# Altium PCB adapter_pcb_bioGAPv2.PcbDoc
Units mm, origin at the board's own origin, x right, y up, seen from the top; angles counter-clockwise.
Board outline 25.25 x 32.12 mm, 2 copper layers (Top Layer, Bottom Layer), stack 0.303 mm thick; 16 components, 17 nets, 94 pads, 102 vias.
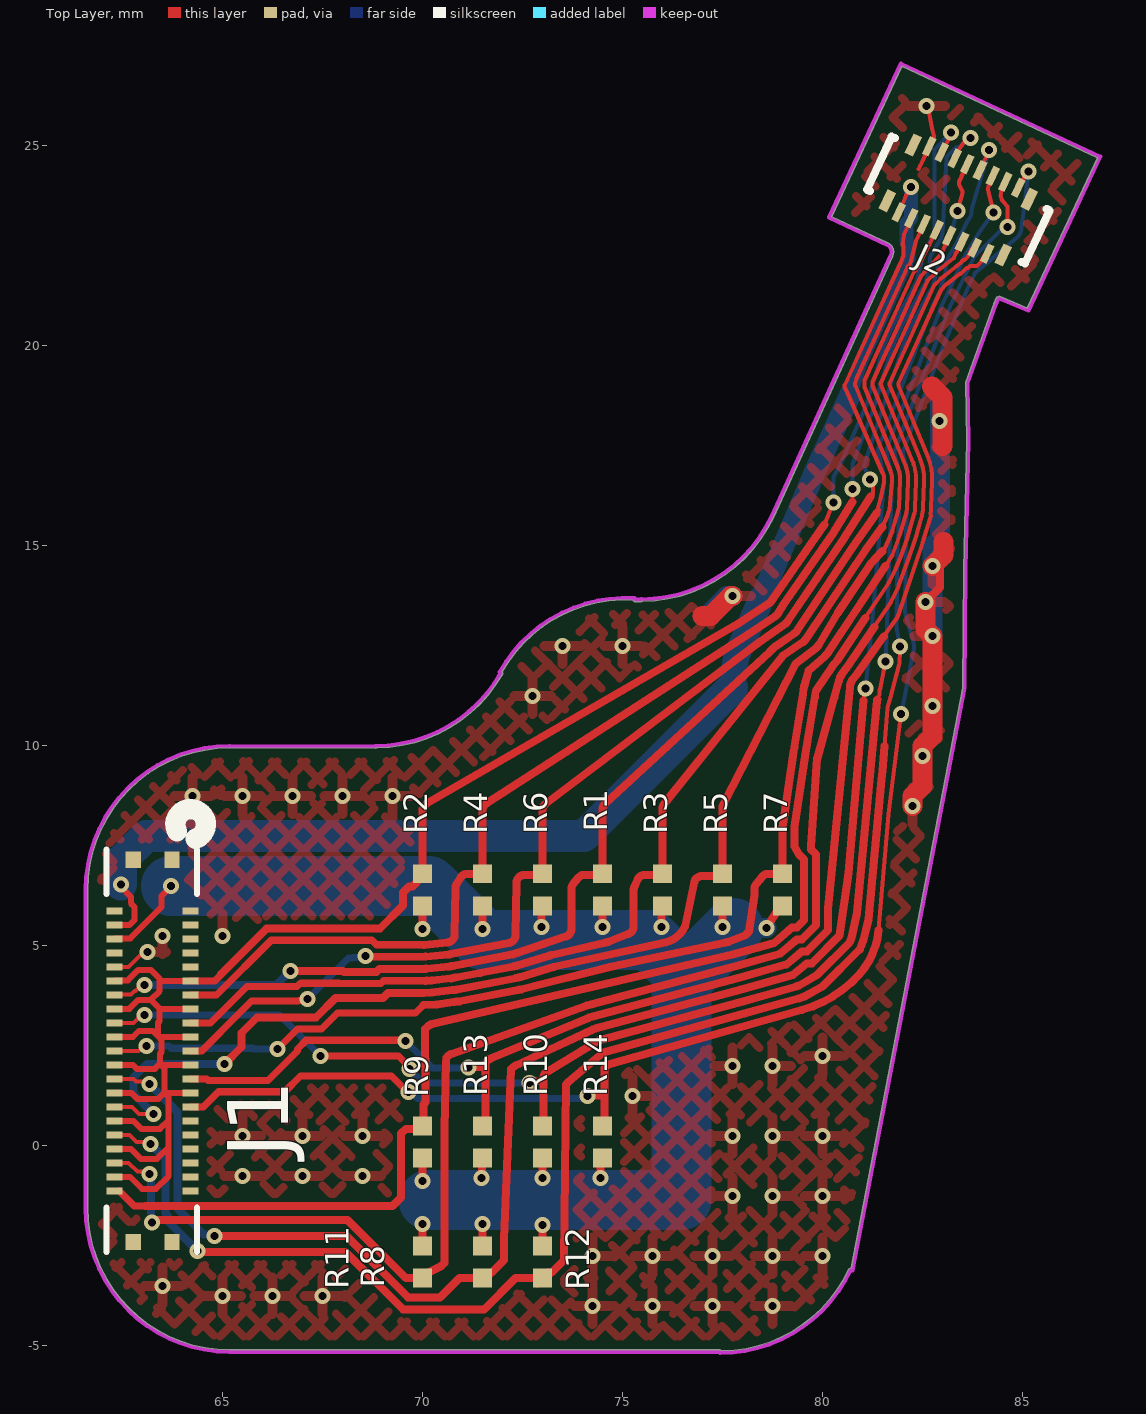
[diagram p0: Top Layer view]
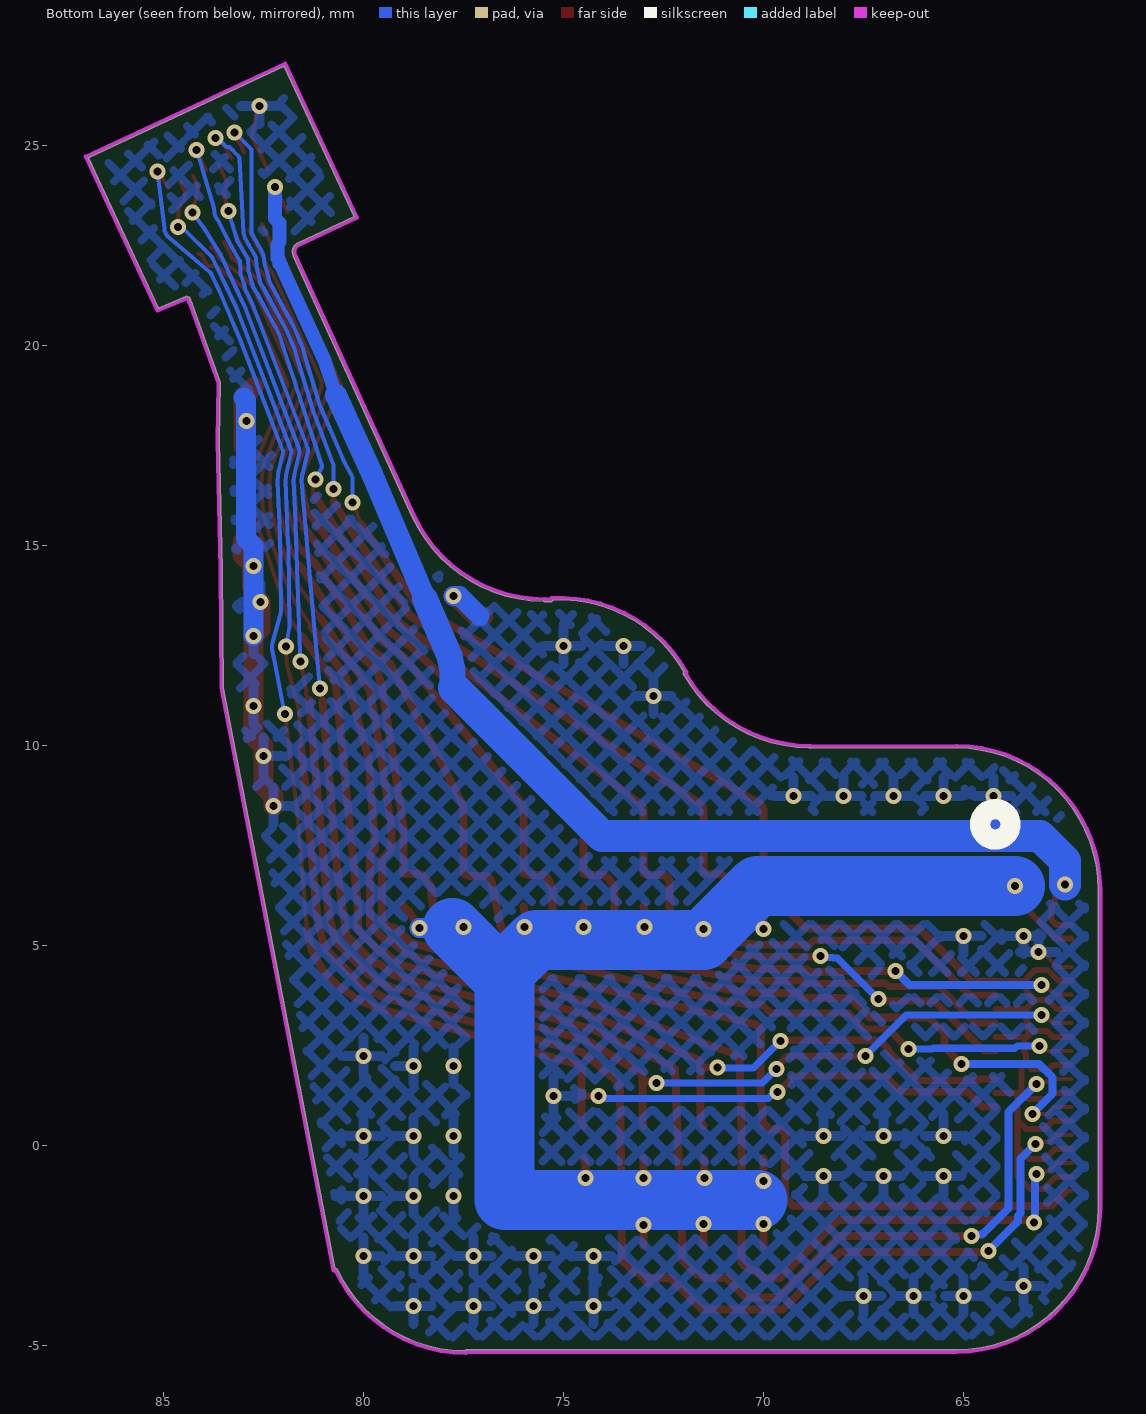
[diagram p1: Bottom Layer view, seen from below]
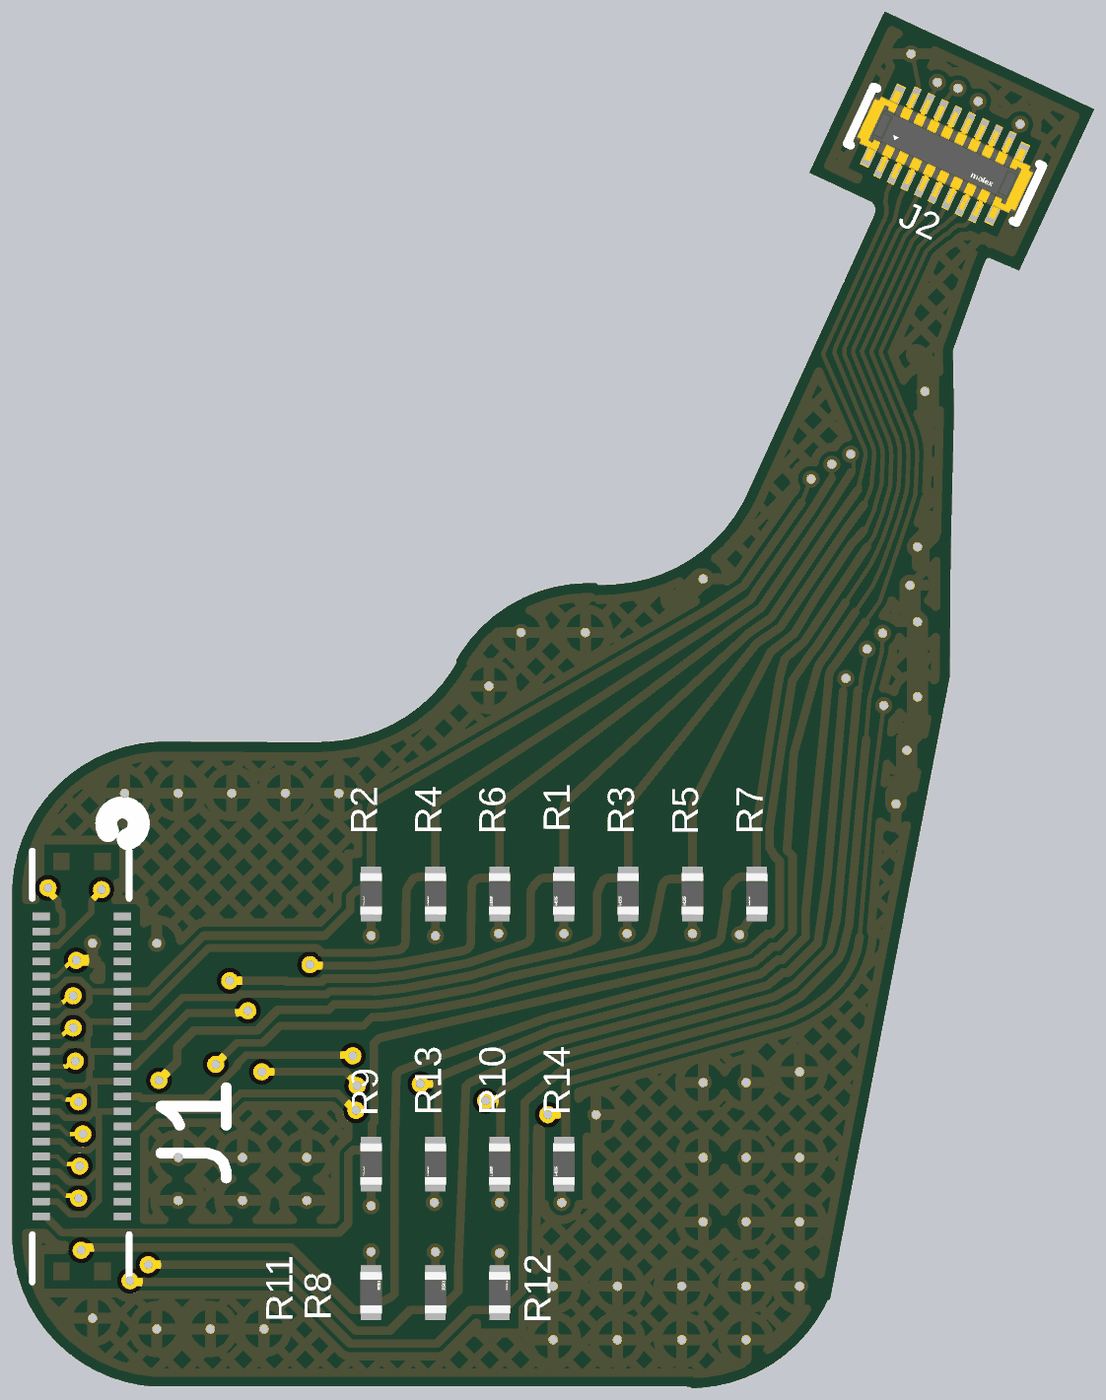
[diagram p2: 3D render of the assembled board from above, using the file's embedded part models]

## Layer stack, top to bottom
Top Coverlay: solder mask 0.0125, FC-001, Dk 4
Adhesive 1: prepreg 0.015, PP-006, Dk 4.1
Top Layer: signal copper 0.018
Adhesive 2: prepreg 0.013, PP-006, Dk 4.1
Dielectric 1: core 0.0125, PI, Dk 4.2
Adhesive 3: prepreg 0.013, PP-006, Dk 4.1
Bottom Layer: signal copper 0.018
Adhesive 4: prepreg 0.015, PP-006, Dk 4.1
Bottom Coverlay: solder mask 0.0125, FC-001, Dk 4
Stiffener 1: core 0.198, Core-009, Dk 4.5

## Board outline
61.627,-1.551 ccw(c65.175,-1.551) 65.175,-5.1 77.438,-5.1 77.483,-5.127 ccw(c77.438,-1.579) 80.654,-3.079 80.711,-3.051 83.5,11.455 83.525,14.4 83.525,14.401 83.6,17.625 83.575,19.074 83.578,19.092 84.278,21.042 84.279,21.045 84.354,21.22 84.42,21.246 85.121,20.946 86.875,24.708 81.982,26.989 80.228,23.229 81.624,22.575 81.65,22.569 cw(c81.525,22.352) 81.775,22.352 81.749,22.242 78.775,15.724 78.775,15.723 cw(c75.468,17.265) 75.5,13.616 75.467,13.604 75.299,13.605 75.25,13.646 ccw(c75.075,10.102) 71.993,11.859 72,11.8 cw(c68.825,13.598) 68.857,9.95 68.825,9.938 65.175,9.95 ccw(c65.175,6.402) 61.627,6.402

## Design rules (kind name [scope] priority, off if disabled: settings)
BoardOutlineClearance [All] p1: gap=0.2 ignorepadtopadclearanceinfootprint=FALSE except(-0.1: Track-SplitContinuation Poly-SplitContinuation; 0.1: Arc-SplitContinuation)
Clearance [All] p1: gap=0.1 ignorepadtopadclearanceinfootprint=FALSE except(0.15: Arc-SMDPad Track-SMDPad; 0.2: Arc-THPad Track-THPad SMDPad-THPad SMDPad-Via SMDPad-Fill SMDPad-Poly SMDPad-Region THPad-Fill THPad-Poly THPad-Region)
ComponentClearance [All] p1: gap=0.1 collisioncheckmode=3 verticalgap=0.254 showdistances=FALSE
DiffPairsRouting [All] p1: maxlimit=0.254 minlimit=0.254 mostfreqgap=0.254 substack1={F7067100-941A-459A-A07F-13557509BD1E} toplayer_{f7067100-941a-459a-a07f-13557509bd1e}_minwidth=0.381 toplayer_{f7067100-941a-459a-a07f-13557509bd1e}_maxwidth=0.381 toplayer_{f7067100-941a-459a-a07f-13557509bd1e}_prefwidth=0.381 bottomlayer_{f7067100-941a-459a-a07f-13557509bd1e}_minwidth=0.381 bottomlayer_{f7067100-941a-459a-a07f-13557509bd1e}_maxwidth=0.381 bottomlayer_{f7067100-941a-459a-a07f-13557509bd1e}_prefwidth=0.381 toplayer_minwidth=0.381 toplayer_maxwidth=0.381 toplayer_prefwidth=0.381 bottomlayer_minwidth=0.381 bottomlayer_maxwidth=0.381 bottomlayer_prefwidth=0.381 substack2={26E46543-D494-4314-9E09-E542AD71FD94} toplayer_{26e46543-d494-4314-9e09-e542ad71fd94}_minwidth=0.381 toplayer_{26e46543-d494-4314-9e09-e542ad71fd94}_maxwidth=0.381 toplayer_{26e46543-d494-4314-9e09-e542ad71fd94}_prefwidth=0.381 bottomlayer_{26e46543-d494-4314-9e09-e542ad71fd94}_minwidth=0.381 bottomlayer_{26e46543-d494-4314-9e09-e542ad71fd94}_maxwidth=0.381 bottomlayer_{26e46543-d494-4314-9e09-e542ad71fd94}_prefwidth=0.381 maxuncoupledlength=12.7
HoleSize [All] p1: absolutevalues=TRUE maxlimit=2.54 minlimit=0.2 maxpercent=80.000 minpercent=20.000
MinimumSolderMaskSliver [All] p1: minsoldermaskwidth=0.1
PolygonConnect [All] p1: connectstyle=Relief reliefconductorwidth=0.254 reliefentries=4 polygonreliefangle="90 Angle" airgapwidth=0.254
RoutingVias [All] p1: holewidth=0.2 width=0.4 viastyle="Through Hole" minholewidth=0.2 minwidth=0.4 maxholewidth=0.2 maxwidth=0.4
SilkToSilkClearance [All] p1: silktosilkclearance=0.1
SilkToSolderMaskClearance [IsPad] p1: minsilkscreentomaskgap=0.1 clearancetoexposedcopper=TRUE
SolderMaskExpansion [All] p1: expansion=0.102 istentingtop=FALSE
Width [All] p1: maxlimit=25 minlimit=0.1 preferedwidth=0.1 substack1={F7067100-941A-459A-A07F-13557509BD1E} substack2={26E46543-D494-4314-9E09-E542AD71FD94}
24 further rules are at their usual default settings.

## Components (designator, comment, footprint, x,y, rotation, side; value= is the part's Value field where it differs from the comment)
J1 "5050664222" CONN_5050664222_MOL 63.225,2.375 r270 top
J2 "505070-1622" FP-505070-1622-MFG 83.393,23.648 r335 top
R1 "RR0510P-472-D" FP-RR0510-IPC_C 74.5,6.402 r270 top
R2 "RR0510P-472-D" FP-RR0510-IPC_C 70,6.402 r270 top
R3 "RR0510P-472-D" FP-RR0510-IPC_C 76,6.402 r270 top
R4 "RR0510P-472-D" FP-RR0510-IPC_C 71.5,6.402 r270 top
R5 "RR0510P-472-D" FP-RR0510-IPC_C 77.5,6.402 r270 top
R6 "RR0510P-472-D" FP-RR0510-IPC_C 73,6.402 r270 top
R7 "RR0510P-472-D" FP-RR0510-IPC_C 79,6.402 r270 top
R8 "RR0510P-472-D" FP-RR0510-IPC_C 71.5,-2.902 r90 top
R9 "RR0510P-472-D" FP-RR0510-IPC_C 70,0.098 r270 top
R10 "RR0510P-472-D" FP-RR0510-IPC_C 73,0.098 r270 top
R11 "RR0510P-472-D" FP-RR0510-IPC_C 70,-2.902 r90 top
R12 "RR0510P-472-D" FP-RR0510-IPC_C 73,-2.902 r90 top
R13 "RR0510P-472-D" FP-RR0510-IPC_C 71.5,0.098 r270 top
R14 "RR0510P-472-D" FP-RR0510-IPC_C 74.5,0.098 r270 top

## Footprints (in the part's own frame and the unit in brackets; to place one, negate y for a bottom-side part, rotate by r counter-clockwise, add the part's x,y. Pads: shape width x height; smd on the part's side, far side on the other; paste and mask are expansions set on the pad)
CONN_5050664222_MOL [mil]
  rect 7x16 smd paste+0 mask+0: 1(-137.8,38.4) 2(-137.8,-36.4) 3(-124.02,38.4) 4(-124.02,-36.4) 5(-110.24,38.4) 6(-110.24,-36.4) 7(-96.46,38.4) 8(-96.46,-36.4) 9(-82.68,38.4) 10(-82.68,-36.4) 11(-68.9,38.4) 12(-68.9,-36.4) 13(-55.12,38.4) 14(-55.12,-36.4) 15(-41.34,38.4) 16(-41.34,-36.4) 17(-27.56,38.4) 18(-27.56,-36.4) 19(-13.78,38.4) 20(-13.78,-36.4) 21(0,38.4) 22(0,-36.4) 23(13.78,38.4) 24(13.78,-36.4) 25(27.56,38.4) 26(27.56,-36.4) 27(41.34,38.4) 28(41.34,-36.4) 29(55.12,38.4) 30(55.12,-36.4) 31(68.9,38.4) 32(68.9,-36.4) 33(82.68,38.4) 34(82.68,-36.4) 35(96.46,38.4) 36(96.46,-36.4) 37(110.24,38.4) 38(110.24,-36.4) 39(124.02,38.4) 40(124.02,-36.4) 41(137.8,38.4) 42(137.8,-36.4)
  rect 16x15 smd paste-8 mask-8: 43(-188.19,20) 44(188.19,20) 45(-188.19,-18) 46(188.19,-18)
  silkscreen extent -238,-45 198,53
FP-505070-1622-MFG [mm]
  rect 0.18x0.485 smd paste-1000 mask+0: 1(-1.225,-0.907) 2(-1.225,0.907) 3(-0.875,-0.907) 4(-0.875,0.907) 5(-0.525,-0.907) 6(-0.525,0.907) 7(-0.175,-0.907) 8(-0.175,0.908) 9(0.175,-0.908) 10(0.175,0.907) 11(0.525,-0.907) 12(0.525,0.907) 13(0.875,-0.907) 14(0.875,0.907) 15(1.225,-0.907) 16(1.225,0.907)
  rect 0.23x0.535 smd paste-1000 mask+0: 17(-1.6,0.767) 18(1.6,0.767) 19(-1.6,-0.767) 20(1.6,-0.767)
  silkscreen extent -2.18,-0.73 2.18,0.73, body extent -2.66,-1.25 2.66,1.25, height 0.25
FP-RR0510-IPC_C [mm]
  rect 0.468x0.472 smd paste+0 mask+0: 1(-0.402,0) 2(0.402,0)
  body extent -0.74,-0.38 0.74,0.38, height 0.25

## Part data
J1: "No Description Available", Mfr_Name="Molex Connector Corporation", RefDes=RefDes, Type=Type
J2: library part CMP-04776-000181-1, "CONN PLUG 16POS SMD GOLD"
R1 R2 R3 R4 R5 R6 R7 R8 R9 R10 R11 R12 R13 R14: library part CMP-2002-01621-2, "4.7kΩ ±0.5% 0.0625W 1/16W Chip Resistor 0402 (1005 Metric) Thin Film", Case Code (Imperial)=0402, Case Code (Metric)=1005, Max Operating Temperature=125°C, Max Power Dissipation=63mW, Min Operating Temperature=-55°C, Package Quantity=1, Resistance=4.7kR, Resistance Tolerance=0.5%, Resistor Type="Thin Film", Temperature Coefficient=25ppm/°C, Voltage Rating=25V, Case/Package=0402, Height=0.016inch, Lead Free="Lead Free", Length=0.039inch, Number of Pins=2, Number of Terminations=2, Packaging="Cut Tape", Power Rating=63mW, RoHS Compliant=Yes, Series=RR, Size Code=0402, Termination=SMD/SMT, Tolerance=0.5%, Voltage Rating (DC)=25V, Weight=2.3E-05oz, Width=0.02inch

## Via types
v1: diameter 0.4, hole 0.2, Top Layer to Bottom Layer, tented both sides, 77 vias
v2: diameter 0.4, hole 0.2, Top Layer to Bottom Layer, 25 vias

## Nets (pads, with @x,y where several pads share a name; then routed paths per layer and width w, separated by ;. In a path a pad name is that pad's centre, name@x,y a point inside that pad or via, vN(x,y) a via of type N, cw(c..) or ccw(c..) an arc to the next point about the centre after c; other vN are vias at no path point)
ADC_EAR_L: J1.29 J2.16 R14.1 | length 40.9
  Top Layer w0.1: 81.402,5.4 81.645,8.286 cw(c81.745,8.278) 81.645,8.291 v1(81.964,10.795) ; J2.16 84.916,24.024 v1(85.146,24.359)
  Top Layer w0.18: J1.29 64.201,0.976 64.521,0.976 64.9,1.355 66.555,1.355 66.95,1.75 69.225,1.75 69.625,1.35 v2(69.65,1.35) ; v2(74.125,1.25) 74.504,1.25 74.542,1.288
  Top Layer w0.2: R14.1 74.542,0.634 74.542,1.288 74.542,1.942 74.638,2.037 79.49,3.402 ccw(c78.671,6.319) 80.906,4.273 ; 80.906,4.273 ccw(c79.472,5.577) 81.402,5.4
  Bottom Layer w0.1: v1(81.964,10.795) 82.046,11.214 82.212,12.059 82.281,12.416 ccw(c81.938,12.483) 82.275,12.579 82.059,13.342 cw(c82.155,13.369) 82.055,13.37 ; 82.055,13.371 82.07,14.545 82.087,15.261 ; 82.087,15.263 82.14,16.623 ccw(c81.191,16.66) 82.116,16.879 82.01,17.323 cw(c82.108,17.346) 82.014,17.382 82.495,18.64 83.044,20.065 cw(c83.137,20.03) 83.045,20.069 83.39,20.881 83.605,21.388 cw(c83.697,21.349) 83.606,21.392 ; 83.607,21.392 83.801,21.801 cw(c83.892,21.759) 83.827,21.835 ; 83.827,21.835 84.024,22.002 84.855,22.704 ccw(c84.628,22.971) 84.976,22.93 v1(85.146,24.359)
  Bottom Layer w0.18: v2(69.65,1.35) 69.71,1.35 69.875,1.185 74,1.185 74.065,1.25 v2(74.125,1.25)
ADC_EAR_R: J1.25 J2.15 R13.1 | length 37.6
  Top Layer w0.1: 81.53,12.741 81.863,13.21 ccw(c81.741,13.297) 81.883,13.249 82.502,15.086 82.526,15.16 82.7,15.715 82.7,15.718 82.709,15.748 ccw(c82.516,15.802) 82.71,15.751 82.698,15.804 ccw(c81.716,15.993) 82.716,15.955 ; 82.716,15.955 82.74,16.602 ccw(c81.191,16.66) 82.625,17.25 ccw(c81.191,16.66) 82.623,17.253 81.894,19.024 81.894,19.065 82.96,21.402 83.088,21.53 83.423,21.798 83.448,21.798 83.595,21.945 83.63,21.945 83.683,21.998 83.725,21.998 83.736,21.998 83.737,21.998 83.865,21.998 83.948,22.081 84.032,22.261 84.063,22.292 84.089,22.299 J2.15
  Top Layer w0.18: J1.25 64.602,1.675 64.642,1.635 66.137,1.635 66.875,2.373 66.875,2.425 67.09,2.64 69.39,2.64 69.4,2.65 69.55,2.65 v2(69.575,2.625) ; v2(71.15,1.965) 71.152,1.967 71.537,1.967 71.568,1.998
  Top Layer w0.2: R13.1 71.568,0.634 71.568,1.998 cw(c71.768,1.998) 71.712,2.19 74.162,3.206 74.254,3.237 77.887,4.197 79.098,4.538 79.488,4.866 79.609,4.866 80.136,5.393 80.136,5.928 80.663,11.214 80.672,11.338 ; 80.672,11.339 ccw(c80.523,11.349) 80.672,11.34 80.679,11.456 cw(c81.079,11.432) 80.781,11.699 80.785,11.703 ccw(c79.732,12.626) 80.874,11.816 81.53,12.741
  Bottom Layer w0.18: v2(69.575,2.625) 70.25,1.95 71.135,1.95 v2(71.15,1.965)
ADC_EOG_CENTER: J1.38 J2.13 R11.1 | length 43.9
  Top Layer w0.1: J1.38 62.654,-0.425 62.871,-0.643 63.118,-0.643 v2(63.175,-0.7) ; 81.295,12.976 81.694,13.566 ccw(c81.57,13.65) 81.705,13.586 ; 81.705,13.587 81.9,14.003 82.148,14.677 82.302,15.12 82.326,15.193 82.35,15.267 82.388,15.418 cw(c82.485,15.393) 82.389,15.421 82.48,15.734 ccw(c82.095,15.845) 82.488,15.769 82.502,15.841 ccw(c81.716,15.993) 82.516,15.963 82.54,16.608 ccw(c81.191,16.66) 82.439,17.176 81.996,18.251 81.984,18.28 81.676,19.028 81.676,19.069 82.793,21.518 82.954,21.679 83.353,21.998 83.365,21.998 83.483,22.115 cw(c83.554,22.046) 83.483,22.116 83.512,22.145 83.547,22.145 83.631,22.229 83.716,22.41 83.749,22.444 83.778,22.45 J2.13
  Top Layer w0.2: v2(63.235,-1.913) 63.287,-1.913 63.35,-1.85 68.125,-1.85 69.579,-3.304 R11.1 70.136,-3.17 70.439,-3.02 70.468,-3.005 70.55,-2.923 70.55,0.424 70.59,2.124 70.592,2.204 70.648,2.26 70.706,2.294 74.1,3.506 74.205,3.537 77.845,4.497 78.946,4.807 79.364,5.166 79.485,5.166 79.836,5.517 79.836,7.287 79.778,7.345 79.711,7.413 79.711,7.502 79.866,9.683 79.871,9.702 80.292,11.214 80.405,11.62 cw(c81.079,11.432) 80.557,11.898 80.56,11.902 ccw(c79.732,12.626) 80.644,12.01 81.295,12.976
  Bottom Layer w0.2: v2(63.175,-0.7) 63.205,-0.73 63.205,-1.883 v2(63.235,-1.913)
ADC_EOG_L: J1.34 J2.14 R12.1 | length 47.5
  Top Layer w0.1: J1.34 62.674,0.275 62.85,0.099 63.151,0.099 v2(63.2,0.05) ; 81.55,10 81.624,10.94 cw(c81.724,10.933) 81.627,10.958 ; 81.627,10.959 81.696,11.214 81.913,12.021 ccw(c81.575,12.112) 81.924,12.1 81.933,12.338 v1(81.938,12.483) ; J2.14 84.497,23.922 84.476,23.876 ccw(c84.703,23.771) 84.529,23.591 84.625,23.482 v1(84.628,22.971)
  Top Layer w0.2: v2(64.375,-2.625) 64.4,-2.65 68.076,-2.65 69.515,-4.088 71.54,-4.088 72.324,-3.304 R12.1 ; R12.1@72.864,-3.441 72.864,-3.438 72.865,-3.437 72.867,-3.437 R12.1 ; 81.553,10 81.494,9.368 81.475,9.166 81.151,5.655 81.014,5.126 81.01,5.11 cw(c78.389,6.058) 80.931,4.915 80.001,3.986 79.536,3.729 cw(c78.671,6.319) 79.412,3.691 78.047,3.307 74.513,2.337 73.645,1.598 73.588,1.541 73.536,-2.858 73.224,-3.17 73.134,-3.17 R12.1
  Bottom Layer w0.1: 81.85,12.98 ccw(c81.95,12.979) 81.852,12.962 v1(81.938,12.483) ; 81.85,12.981 81.876,14.968 cw(c81.976,14.967) 81.876,14.97 ; 81.876,14.971 81.88,15.08 81.941,16.631 ccw(c81.191,16.66) 81.921,16.833 81.802,17.337 cw(c81.899,17.36) 81.807,17.399 82.273,18.619 83.15,20.898 83.151,20.901 83.183,20.967 83.776,22.214 83.794,22.232 84.502,22.941 84.533,22.971 84.574,22.971 v1(84.628,22.971)
  Bottom Layer w0.2: v2(63.2,0.05) 63.575,-0.325 63.575,-1.687 63.635,-1.747 63.635,-1.885 v2(64.375,-2.625)
ADC_EOG_R: J1.42 J2.11 R9.1 | length 40.6
  Top Layer w0.1: J1.42 J1.42@62.415,-1.125 ; 81.071,13.2 81.648,14.072 ccw(c81.398,14.237) 81.649,14.073 81.653,14.08 ccw(c81.52,14.151) 81.654,14.084 81.825,14.423 81.948,14.717 82.119,15.207 ccw(c82.025,15.24) 82.121,15.212 82.287,15.788 ccw(c82.095,15.845) 82.292,15.807 82.306,15.879 ccw(c81.716,15.993) 82.316,15.97 82.34,16.616 ccw(c81.191,16.66) 82.278,17.036 ccw(c81.191,16.66) 82.255,17.098 ; 82.254,17.099 81.449,19.053 82.626,21.634 82.82,21.828 83.283,22.198 83.349,22.342 83.355,22.348 83.395,22.433 83.444,22.525 J2.11
  Top Layer w0.18: J1.42@62.415,-1.125 62.79,-1.5 63.075,-1.5
  Top Layer w0.2: 63.075,-1.5 69.25,-1.5 69.464,-1.286 69.464,0.307 69.581,0.424 69.864,0.424 69.864,0.439 R9.1@70.016,0.591 ; R9.1 R9.1@70.016,0.591 ; 81.071,13.2 80.399,12.184 cw(c79.732,12.626) 80.335,12.1 80.333,12.097 ccw(c81.079,11.432) 80.253,11.995 79.855,11.412 79.83,11.375 79.804,11.214 79.575,9.816 79.302,7.977 79.302,7.863 79.3,7.86 79.3,7.482 79.411,7.288 79.478,7.221 79.536,7.163 79.536,5.642 79.36,5.466 79.24,5.466 78.79,5.075 78.703,5.05 77.748,4.783 70.236,3.047 ccw(c70.281,2.852) 70.14,2.994 70.063,2.917 70.063,2.173 70.075,2.161 70.075,1.086 70.023,1.034 70.023,0.634 70.016,0.627 R9.1@70.016,0.591
ADC_REF: J1.11 J1.12 J1.15 J1.16 J1.19 J1.20 J1.23 J1.24 J1.27 J1.28 J1.32 J1.36 J1.40 J2.4 R2.1 | length 52.3
  Top Layer w0.1: 80.042,15.53 ccw(c79.98,15.608) 80.051,15.538 v1(80.267,16.08) ; J2.4 83.033,24.961 83.215,25.254 v1(83.215,25.335)
  Top Layer w0.15: J1.40 62.685,-0.775 62.985,-1.075 63.33,-1.075 63.65,-0.755 63.65,-0.03 ; J1.36 62.706,-0.075 62.956,-0.325 63.355,-0.325 63.65,-0.03 ; J1.32 62.768,0.625 62.968,0.425 63.43,0.425 63.65,0.645 ; J1.28 62.72,1.325 62.87,1.175 63.396,1.175 63.546,1.325 ; J1.24 62.754,2.025 62.854,1.925 63.307,1.925 63.432,2.05 ; J1.20 62.76,2.725 62.91,2.875 63.255,2.875 63.475,2.655 63.475,2.345 63.432,2.302 63.432,2.05 ; J1.16 62.67,3.425 62.895,3.65 63.205,3.65 ; J1.12 62.314,4.139 62.634,4.139 62.895,4.4 63.205,4.4 63.425,4.18 63.425,3.87 63.205,3.65 ; 63.425,3.425 J1.15 ; 63.425,4.125 J1.11 ; 63.432,2.698 63.388,2.742 63.388,3.083 63.425,3.12 63.425,3.43 63.205,3.65 ; 63.441,2.69 63.476,2.725 J1.19 ; J1.27 63.546,1.325 ; J1.23 63.457,2.025 ; 63.432,2.05 63.457,2.025 ; 63.457,2.025 63.546,1.936 63.546,1.325 ; 63.546,1.325 63.65,1.221 63.65,0.645 ; 63.65,-0.03 63.65,0.645
  Top Layer w0.18: J1.11 64.804,4.125 64.957,4.278 64.957,4.293
  Top Layer w0.2: 64.957,4.293 66.095,5.43 68.93,5.43 69.514,6.014 69.514,6.338 69.66,6.484 69.747,6.484 69.864,6.601 69.864,6.67 69.998,6.804 R2.1 70,8.385 cw(c70.2,8.385) 70.1,8.558 77.875,13.05 78.671,13.573 ccw(c78.561,13.74) 78.732,13.637 78.738,13.647 cw(c79.167,13.39) 78.75,13.666 78.754,13.671 cw(c78.92,13.561) 78.756,13.674 ; 78.756,13.675 80.024,15.501 ccw(c79.86,15.615) 80.029,15.509 80.042,15.53
  Bottom Layer w0.1: v1(80.267,16.08) 80.267,16.704 80.311,16.802 80.462,17.075 ccw(c80.046,17.305) 80.472,17.095 80.493,17.138 ; 80.494,17.139 ccw(c80.067,17.348) 80.503,17.159 81.073,18.472 ccw(c80.637,18.661) 81.092,18.524 81.42,19.618 81.525,19.97 81.544,20.026 81.74,20.472 81.772,20.536 82.362,21.64 82.387,21.763 82.475,22.062 82.491,22.252 cw(c83.25,22) 82.554,22.395 82.629,22.525 82.781,22.789 ccw(c82.695,22.839) 82.795,22.839 ; 82.795,22.84 82.795,22.843 82.795,24.915 v1(83.215,25.335)
ADC_TL1: J1.14 J2.3 R1.1 | length 33.7
  Top Layer w0.1: J1.14 62.313,3.788 62.714,3.788 62.801,3.875 62.819,3.875 62.969,4.025 v2(63.05,4.025) ; 81.35,15.825 81.373,15.91 81.442,16.168 ccw(c81.2,16.233) 81.444,16.179 81.533,16.585 ccw(c81.191,16.66) 81.511,16.802 80.621,18.819 80.561,18.955 80.553,18.974 80.553,19.017 81.958,22.097 81.976,22.116 81.987,22.161 81.999,22.188 cw(c82.099,22.181) 82.025,22.248 82.025,22.455 82.019,22.462 82.017,22.495 82.006,22.505 82.003,22.52 82.003,22.551 82.004,22.557 82.032,22.776 82.144,23.016 J2.3 ; 81.375,15.85 81.407,15.9
  Top Layer w0.2: v2(66.7,4.375) 68.01,4.375 68.035,4.35 68.842,4.35 68.92,4.428 70.077,4.428 70.085,4.429 70.089,4.429 70.686,4.49 ccw(c70.603,5.286) 70.754,4.5 72.222,4.781 ccw(c72.128,5.272) 72.287,4.798 72.289,4.799 73.589,5.239 ccw(c73.525,5.428) 73.725,5.428 73.725,6.429 cw(c73.925,6.429) 73.77,6.555 73.889,6.701 cw(c74.045,6.575) 74.045,6.775 74.364,6.775 R1.1 74.5,8.412 cw(c74.7,8.412) 74.564,8.559 78.675,12.35 78.789,12.463 cw(c79,12.25) 78.833,12.499 79.301,12.818 ccw(c79.188,12.984) 79.355,12.873 80.756,14.971 81.354,15.822
  Bottom Layer w0.2: v2(63.05,4.025) 66.343,4.025 66.693,4.375 v2(66.7,4.375)
ADC_TL2: J1.13 J2.6 R4.1 | length 33.8
  Top Layer w0.1: 80.75,16.1 v1(80.75,16.425) ; J2.6 83.39,24.86 83.429,24.943 83.62,25.201 83.692,25.201 v1(83.695,25.198)
  Top Layer w0.18: J1.13 64.85,3.775 66.215,5.14 68.737,5.14 68.849,5.027 70.041,5.027
  Top Layer w0.2: 70.041,5.027 70.624,5.087 ccw(c70.603,5.286) 70.803,5.281 ; 70.803,5.282 70.824,6.447 cw(c71.024,6.444) 70.851,6.545 70.942,6.7 cw(c71.115,6.6) 71.115,6.8 71.364,6.8 R4.1 71.5,8.391 cw(c71.7,8.391) 71.591,8.559 78.15,12.8 78.826,13.248 ccw(c78.716,13.415) 78.887,13.312 78.996,13.493 ; 78.996,13.493 cw(c79.167,13.39) 79.005,13.506 79.005,13.508 80.271,15.331 ccw(c79.86,15.615) 80.284,15.352 80.75,16.1
  Bottom Layer w0.1: v1(80.75,16.425) 80.75,17.034 81.269,18.419 81.273,18.43 81.721,19.92 81.94,20.421 82.458,21.379 82.508,21.47 82.542,21.522 82.567,21.562 82.592,21.676 82.675,21.979 82.689,22.212 cw(c83.25,22) 82.727,22.295 82.86,22.525 82.954,22.688 ccw(c82.695,22.839) 82.994,22.822 83.098,24.687 cw(c83.198,24.682) 83.127,24.752 83.351,24.976 83.422,24.976 83.644,25.198 v1(83.695,25.198)
ADC_TL3: J1.17 J2.5 R3.1 | length 32.4
  Top Layer w0.1: 81.5,15.475 81.625,15.764 81.676,15.912 81.739,16.611 ccw(c81.191,16.66) 81.741,16.64 ccw(c81.191,16.66) 81.7,16.87 80.816,19.014 80.816,19.076 80.849,19.184 82.125,21.982 82.176,22.033 82.225,22.165 82.309,22.532 82.332,22.613 ; 82.332,22.614 82.452,22.873 J2.5
  Top Layer w0.18: J1.17 64.7,3.075 65.61,3.985 66.862,3.985 66.937,4.06 66.958,4.06 66.963,4.065 67.91,4.065 67.915,4.06 68.962,4.06 69.029,4.127 70.076,4.127
  Top Layer w0.2: 70.076,4.127 70.104,4.129 70.224,4.14 70.712,4.191 ccw(c70.603,5.286) 70.81,4.205 71.449,4.328 72.278,4.486 ccw(c72.128,5.272) 72.328,4.498 ccw(c72.128,5.272) 72.362,4.507 72.364,4.508 73.187,4.762 cw(c73.275,4.475) 73.208,4.767 74.589,5.085 74.591,5.085 ccw(c74.5,5.475) 74.647,5.103 74.649,5.104 75.149,5.303 ; 75.149,5.303 ccw(c75.075,5.488) 75.275,5.488 75.275,6.384 cw(c75.475,6.384) 75.291,6.463 75.373,6.653 cw(c75.557,6.575) 75.557,6.775 75.864,6.775 R3.1 76,8.43 cw(c76.2,8.43) 76.044,8.555 79,12.25 ; 79.001,12.251 79.518,12.603 ccw(c79.405,12.768) 79.572,12.657 81.101,14.941 81.483,15.456 81.5,15.475
ADC_TL4: J1.21 J2.8 R6.1 | length 33.4
  Top Layer w0.1: v1(81.191,16.66) 81.249,16.603 81.249,16.501 81.262,16.488 81.262,16.283 81.2,16.233 ; v1(83.376,23.375) 83.494,23.815 ccw(c83.397,23.841) 83.487,23.886 83.412,24.037 83.412,24.1 83.537,24.369 J2.8
  Top Layer w0.18: J1.21 64.201,2.376 64.483,2.376 64.95,2.843 64.95,2.85 65.725,3.625 66.9,3.625 66.908,3.633 67.083,3.633 v2(67.125,3.675) ; v2(68.575,4.75) 68.596,4.729 70.074,4.729
  Top Layer w0.2: 70.074,4.729 70.655,4.788 ; 70.656,4.789 ccw(c70.603,5.286) 70.697,4.795 72.165,5.076 ccw(c72.128,5.272) 72.328,5.268 ; 72.328,5.269 72.347,6.577 cw(c72.547,6.575) 72.547,6.775 72.864,6.775 R6.1 73,8.4 cw(c73.2,8.4) 73.08,8.56 78.4,12.575 79.071,13.054 ccw(c78.955,13.217) 79.12,13.104 80.521,15.166 ccw(c79.86,15.615) 80.534,15.185 ccw(c79.86,15.615) 80.536,15.188 81.2,16.233
  Bottom Layer w0.1: v1(81.191,16.66) 81.047,16.943 81.036,16.965 81.036,16.989 81.036,17.005 82.115,20.314 82.658,21.32 82.725,21.425 82.757,21.475 82.772,21.537 ccw(c82.481,21.608) 82.772,21.539 ccw(c82.481,21.608) 82.777,21.563 82.78,21.581 82.875,21.896 82.889,22.171 82.891,22.176 cw(c83.25,22) 82.906,22.204 ; 82.906,22.205 83.091,22.525 83.128,22.589 ccw(c82.695,22.839) 83.174,22.696 v1(83.376,23.375)
  Bottom Layer w0.18: v2(67.125,3.675) 68.15,4.7 68.25,4.7 68.258,4.708 68.533,4.708 v2(68.575,4.75)
ADC_TR1: J1.30 J2.7 R5.1 | length 37.2
  Top Layer w0.1: J1.30 62.736,0.975 62.911,0.8 v2(63.275,0.8) ; 81.5,14.875 81.55,14.925 81.747,15.368 ; 81.741,15.379 81.885,15.871 81.89,15.886 81.902,15.919 ccw(c81.716,15.993) 81.916,15.985 81.941,16.631 ccw(c81.191,16.66) 81.885,16.946 81.11,18.826 81.049,18.974 81.049,19.14 82.292,21.866 82.376,21.95 82.668,22.528 82.771,22.724 J2.7
  Top Layer w0.2: v2(65.05,2.05) 65.477,2.477 65.477,2.827 65.865,3.215 67.34,3.215 67.825,3.7 69.012,3.7 69.135,3.823 70.024,3.823 70.232,3.832 70.746,3.893 70.748,3.893 ccw(c70.603,5.286) 70.866,3.911 72.334,4.192 ccw(c72.128,5.272) 72.452,4.221 73.267,4.473 cw(c73.326,4.281) 73.283,4.477 76.06,5.084 ccw(c75.908,5.782) 76.565,5.501 76.792,6.591 cw(c76.988,6.55) 76.798,6.613 cw(c76.988,6.55) 76.988,6.75 77.364,6.75 R5.1 77.5,8.452 cw(c77.7,8.452) 77.522,8.543 79.325,12.05 79.832,12.441 ccw(c79.709,12.6) 79.861,12.47 cw(c81.079,11.432) 79.882,12.493 ccw(c79.732,12.626) 79.903,12.523 ; 79.904,12.524 80.379,13.323 cw(c80.551,13.222) 80.385,13.333 81.191,14.536 ; 81.191,14.536 cw(c81.358,14.426) 81.211,14.561 81.492,14.866 81.5,14.875
  Bottom Layer w0.2: v2(63.275,0.8) 62.771,1.304 62.771,1.716 63.105,2.05 v2(65.05,2.05)
ADC_TR2: J1.26 J2.10 R8.1 | length 48.5
  Top Layer w0.1: J1.26 62.771,1.675 62.839,1.607 63.114,1.607 v2(63.171,1.55) ; 81,11.05 81.017,11.133 81.034,11.214 v1(81.079,11.432) ; J2.10 84.017,24.571 v1(84.166,24.891)
  Top Layer w0.2: v2(64.8,-2.25) 68.101,-2.25 69.639,-3.788 70.437,-3.788 70.921,-3.304 R8.1 71.636,-3.212 71.669,-3.212 71.753,-3.141 cw(c71.882,-3.294) 71.754,-3.14 71.86,-3.035 72.036,-2.858 72.036,-2.33 72.213,1.917 72.268,1.972 72.326,2.009 74.247,2.905 74.318,2.937 77.965,3.908 79.255,4.27 79.613,4.566 79.733,4.566 80.424,5.256 80.646,6.82 81.017,11.133
  Bottom Layer w0.1: v1(81.079,11.432) 81.237,13.034 ; 81.237,13.034 81.237,13.036 81.54,16.631 ccw(c81.191,16.66) 81.541,16.646 ccw(c81.191,16.66) 81.532,16.741 81.382,17.371 cw(c81.48,17.395) 81.386,17.43 81.405,17.479 82.728,20.927 82.751,20.988 82.78,21.059 82.812,21.127 82.825,21.154 82.881,21.269 82.928,21.363 82.944,21.396 82.967,21.491 ccw(c82.481,21.608) 82.975,21.531 83.075,21.813 83.089,22.121 83.301,22.489 ccw(c82.695,22.839) 83.318,22.521 83.321,22.525 83.611,23.095 cw(c83.968,22.913) 83.644,23.149 83.659,23.169 ccw(c83.376,23.375) 83.726,23.362 83.726,23.365 cw(c84.275,23.337) 83.748,23.495 v1(84.166,24.891)
  Bottom Layer w0.2: v2(63.171,1.55) 63.875,0.846 63.875,-1.563 64.527,-2.215 64.765,-2.215 v2(64.8,-2.25)
ADC_TR3: J1.22 J2.9 R7.1 | length 36
  Top Layer w0.1: J1.22 62.894,2.375 63.019,2.5 v2(63.1,2.5) ; 81.575,14.5 81.742,14.765 81.927,15.27 81.934,15.291 ; 81.935,15.292 ccw(c81.84,15.325) 81.936,15.297 82.095,15.845 ; 82.097,15.868 ccw(c81.716,15.993) 82.116,15.978 82.14,16.624 ccw(c81.191,16.66) 82.069,17.023 81.249,19.014 81.249,19.097 82.459,21.75 82.576,21.867 82.875,22.203 82.934,22.261 ccw(c82.868,22.337) 82.959,22.295 83.063,22.525 83.087,22.577 J2.9
  Top Layer w0.18: v2(66.375,2.425) 66.875,2.925 67.475,2.925 67.875,3.325 69.825,3.325 70.023,3.523
  Top Layer w0.2: 70.023,3.523 70.36,3.536 70.78,3.595 ccw(c70.603,5.286) 70.922,3.616 72.39,3.897 ccw(c72.128,5.272) 72.468,3.914 72.47,3.915 ; 72.472,3.915 74.731,4.486 cw(c74.78,4.292) 74.739,4.488 ; 74.739,4.488 77.581,5.083 ccw(c77.5,5.475) 77.645,5.102 77.647,5.103 78.073,5.27 78.161,5.358 78.3,6.262 78.3,6.428 cw(c78.5,6.428) 78.346,6.556 78.49,6.728 cw(c78.644,6.6) 78.644,6.8 78.864,6.8 R7.1 79,7.985 79.019,8.117 79.275,9.84 79.292,9.958 79.493,11.214 79.504,11.284 79.538,11.48 79.548,11.518 79.654,11.889 80.037,12.222 ccw(c79.709,12.6) 80.088,12.273 cw(c81.079,11.432) 80.108,12.296 80.11,12.298 ccw(c79.732,12.626) 80.149,12.351 80.855,13.416 81.398,14.237 ; 81.398,14.238 cw(c81.65,14.075) 81.401,14.243 81.575,14.5
  Bottom Layer w0.18: v2(63.1,2.5) 63.656,2.5 63.716,2.44 65.76,2.44 65.775,2.425 v2(66.375,2.425)
ADC_TR4: J1.18 J2.12 R10.1 | length 41.2
  Top Layer w0.1: J1.18 62.769,3.075 62.969,3.275 v2(63.05,3.275) ; 81.395,11.214 81.429,11.287 81.426,11.358 cw(c81.626,11.364) 81.43,11.404 v1(81.575,12.112) ; J2.12 84.18,24.069 84.159,24.024 ccw(c84.386,23.919) 84.143,23.857 v1(84.275,23.337)
  Top Layer w0.18: v2(67.45,2.25) 69.4,2.25 69.675,1.975 v2(69.675,1.925) ; v2(72.675,1.575) 72.717,1.617 72.944,1.617 73.022,1.695
  Top Layer w0.2: R10.1 73.022,0.634 73.022,1.695 cw(c73.222,1.695) 73.17,1.888 73.178,1.891 73.193,1.895 74.402,2.637 78.005,3.607 79.331,3.98 ccw(c78.671,6.319) 79.412,4.004 79.875,4.284 80.679,5.087 ccw(c78.389,6.058) 80.724,5.201 80.863,5.818 80.866,5.831 81.355,11.127 ; 81.355,11.128 81.361,11.148 81.369,11.156
  Bottom Layer w0.1: v1(81.575,12.112) 81.595,12.676 81.709,15.894 ; 81.709,15.894 81.741,16.636 ccw(c81.191,16.66) 81.726,16.787 81.597,17.334 81.599,17.39 81.605,17.42 cw(c81.899,17.36) 81.618,17.466 81.619,17.468 82.121,18.782 82.951,20.947 82.98,21.013 83.032,21.118 83.094,21.246 83.134,21.331 83.576,22.297 83.636,22.391 83.967,22.912 v1(84.275,23.337)
  Bottom Layer w0.18: v2(63.05,3.275) 66.425,3.275 v2(67.45,2.25) ; v2(69.675,1.925) 70.025,1.575 v2(72.675,1.575)
AGND: J1.10 J2.2 | length 20
  Top Layer w0.1: J1.10 62.651,4.475 62.969,4.793 63.068,4.793 v2(63.125,4.85) ; 82.4,24.425 82.449,24.524 ccw(c82.36,24.568) 82.45,24.526 ; 82.451,24.526 82.585,24.814 J2.2 82.757,25.158 82.78,25.208 82.78,25.24 82.74,25.446 82.637,25.966 82.609,25.994 v1@82.601,25.999
  Top Layer w0.203: v1(82.575,13.6) 82.935,13.96 82.935,14.685 82.935,15.185
  Top Layer w0.5: 77,13.25 77.197,13.25 77.697,13.75 v1(77.75,13.75) ; v1(82.25,8.5) 82.25,8.75 82.5,9 v1(82.5,9.75) 82.5,10 82.75,10.25 v1(82.75,11) v1(82.75,12.75) 82.575,12.925 v1(82.575,13.6) ; 82.732,18.982 83,18.713 83,17.5 ; v1(82.75,14.5) 82.935,14.685 83.027,14.777 83.027,15.094
  Bottom Layer w0.5: 77.098,13.25 77.598,13.75 v1(77.75,13.75) ; v1(82.75,12.75) v1(82.75,14.5) 82.75,15 82.935,15.185 82.935,18.649 83,18.713
  other v1: 74.25,-4 75.75,-4 77.25,-4 78.75,-4 65,-3.75 66.25,-3.75 67.5,-3.75 63.5,-3.5 74.25,-2.75 75.75,-2.75 77.25,-2.75 78.75,-2.75 80,-2.75 77.75,-1.25 78.75,-1.25 80,-1.25 65.5,-0.75 67,-0.75 68.5,-0.75 65.5,0.25 67,0.25 68.5,0.25 77.75,0.25 78.75,0.25 80,0.25 75.25,1.25 77.75,2 78.75,2 80,2.25 63.5,5.25 65,5.25 64.25,8.75 65.5,8.75 66.75,8.75 68,8.75 69.25,8.75 72.75,11.25 73.5,12.5 75,12.5 82.925,18.125 82.6,26
AVDD: J1.6 R1.2 R2.2 R3.2 R4.2 R5.2 R6.2 R7.2 R8.2 R9.2 R10.2 R11.2 R12.2 R13.2 R14.2 | length 38.1
  Top Layer w0.15: J1.6 62.314,5.189 62.692,5.189 63.479,5.975 63.479,6.251 63.709,6.482 v2(63.709,6.5)
  Top Layer w0.2: R11.2 v1(70,-1.95) ; v1(70,-0.875) R9.2 ; v1(70,5.425) R2.2 ; v1(71.475,-0.8) 71.487,-0.788 71.487,-0.317 R13.2 ; R8.2 v1(71.5,-1.95) ; v1(71.5,5.425) R4.2 ; v1(72.975,5.475) 72.975,5.866 R6.2 ; R12.2 v1(73,-1.975) ; v1(73,-0.8) R10.2 ; v1(74.45,-0.8) 74.45,-0.438 R14.2 ; v1(74.5,5.475) R1.2 ; v1(75.975,5.475) 75.975,5.866 R3.2 ; v1(77.5,5.475) R5.2 ; v1(78.6,5.45) 78.864,5.866 R7.2
  Bottom Layer w0.5: 77.775,5.45 v1(78.6,5.45)
  Bottom Layer w1.5: v2(63.709,6.5) 70.15,6.5 71.5,5.15 72.975,5.15 74.5,5.15 75.675,5.15 76.475,4.35 76.475,4.15 ; 70.15,-1.35 74.45,-1.35 76.475,-1.35 76.475,4.15 ; 77.775,5.45 76.475,4.15
BIAS: J1.4 J2.1 | length 33.5
  Top Layer w0.1: J2.1 81.979,23.518 82.065,23.703 82.086,23.767 82.086,23.771 82.206,23.892 v1(82.206,23.973)
  Top Layer w0.15: J1.4 62.675,5.525 62.794,5.644 62.794,5.976 62.729,6.041 62.729,6.057 62.706,6.08 62.706,6.226 62.459,6.473 v2(62.459,6.541)
  Bottom Layer w0.35: 80.686,18.767 ccw(c80.54,18.449) 80.684,18.768 80.97,19.631 82.063,22.025 82.09,22.052 82.106,22.12 82.124,22.161 82.124,22.171 82.15,22.197 82.15,22.507 cw(c82.48,22.624) 82.138,22.55 82.1,22.614 82.1,22.709 82.1,23.073 82.206,23.179 v1(82.206,23.973)
  Bottom Layer w0.55: 78.455,13.666 79.786,16.794 79.789,16.8 80.686,18.767
  Bottom Layer w0.65: 77.735,11.45 77.775,11.49 77.775,11.906 77.839,12.22 78.455,13.666
  Bottom Layer w0.8: v2(62.459,6.541) 62.459,7.127 63.082,7.75 74.035,7.75 77.735,11.45
pads on no net: J1.1 J1.2 J1.3 J1.5 J1.7 J1.8 J1.9 J1.31 J1.33 J1.35 J1.37 J1.39 J1.41 J1.43 J1.44 J1.45 J1.46 J2.17 J2.18 J2.19 J2.20

## Polygon pours and split planes (outlines as drawn)
AGND on Bottom Layer "AGND_L02_P000" (hatched 45Degree grid 0.508 track 0.203, pour order 0): 19.123,-13.412 94.474,-14.39 91.4,51.2 16.935,47.459
AGND on Top Layer "AGND_L01_P001" (hatched 45Degree grid 0.508 track 0.203, remove dead copper, pour order 1): 18.273,-13.612 93.624,-14.59 90.55,51 16.085,47.259

## Keep-outs
Keep-Out Layer:
  lines w0.1: 68.825,9.988 65.175,10 ccw(c65.175,6.402) 61.576,6.402 61.576,-1.551 ccw(c65.175,-1.551) 65.175,-5.15 77.438,-5.15 ; 68.825,10 ccw(c68.825,13.598) 71.956,11.825 ; 71.925,11.842 cw(c75.075,10.102) 75.3,13.693 ; 75.299,13.655 75.468,13.655 ; 75.468,13.666 ccw(c75.468,17.265) 78.729,15.744 81.707,22.271 ; 77.438,-5.178 ccw(c77.438,-1.579) 80.7,-3.1 ; 80.75,-3.11 83.55,11.45 83.575,14.4 83.65,17.625 83.625,19.075 84.325,21.025 84.4,21.2 85.146,20.881 ; 81.623,22.52 80.162,23.205 81.958,27.056 86.942,24.732 85.146,20.88 ; 81.625,22.525 cw(c81.525,22.352) 81.708,22.27 ; 85.146,20.881 85.146,20.88

## Silkscreen, mask and mechanical layers (free items; w line width, h text height)
Mechanical 10:
  lines w0.1: 81.623,22.52 81.625,22.525 ; 81.625,22.525 cw(c81.525,22.352) 81.708,22.27 81.707,22.271 78.729,15.744 cw(c75.468,17.265) 75.468,13.666 83.55,11.45 83.575,14.4 83.612,16.013 83.65,17.625 83.638,18.35 83.625,19.075 84.325,21.025 84.4,21.2 81.625,22.525
  text "2 layer flex stackup" at 64.998,20.376 h2
  text "no stiffener" at 64.998,18.514 h2
Mechanical 12:
  lines w0.1: 75.468,13.666 83.55,11.45 ; 75.5,13.616 75.467,13.604 75.299,13.605 75.25,13.646 ccw(c75.075,10.102) 71.993,11.859 72,11.8 cw(c68.825,13.598) 68.857,9.95 68.825,9.938 65.175,9.95 ccw(c65.175,6.402) 61.627,6.402 61.627,6.402 61.627,-1.551 ccw(c65.175,-1.551) 65.175,-5.1 ; 81.775,22.352 ccw(c81.525,22.352) 81.65,22.569 81.624,22.575 80.228,23.229 81.982,26.989 86.875,24.708 85.121,20.946 84.42,21.246 84.354,21.22 ; 83.5,11.455 80.711,-3.051 80.654,-3.079 cw(c77.438,-1.579) 77.483,-5.127 77.438,-5.1 65.175,-5.1 ; 65.175,-5.1 65.175,-5.1 ; 85.146,20.88 86.942,24.732 81.958,27.056 80.162,23.205 81.623,22.52 81.625,22.525 85.146,20.881 ; 85.146,20.881 85.146,20.88
  text "2 layer flex stackup" at 85,27.501 h2
  text "with stiffener on bottom" at 85,25.639 h2
  text "2 layer flex stackup" at 49.7,12.9 h2
  text "with stiffener on bottom" at 49.701,11.038 h2

## Text inside footprints (layer, text, board x,y; h text height)
J1: Top 3D Body "RefDes2" at 62.615,4.597 h1.27 r270